# EAGLE board greenhousectrl (EAGLE 7.7.0)
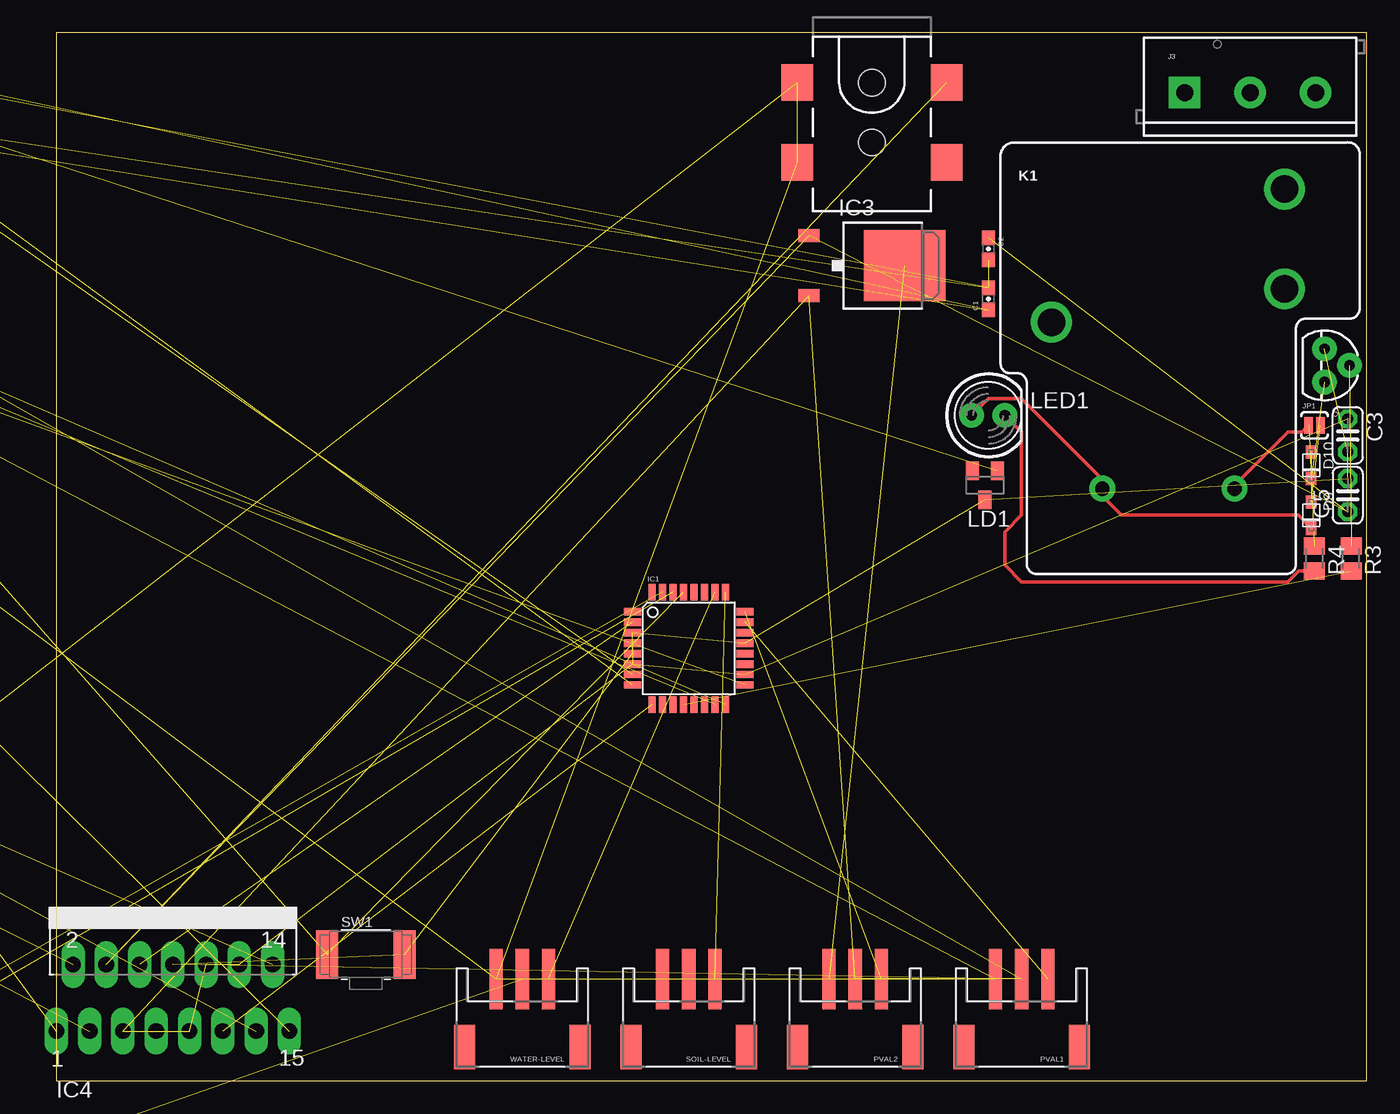
[diagram p0: board, top side]
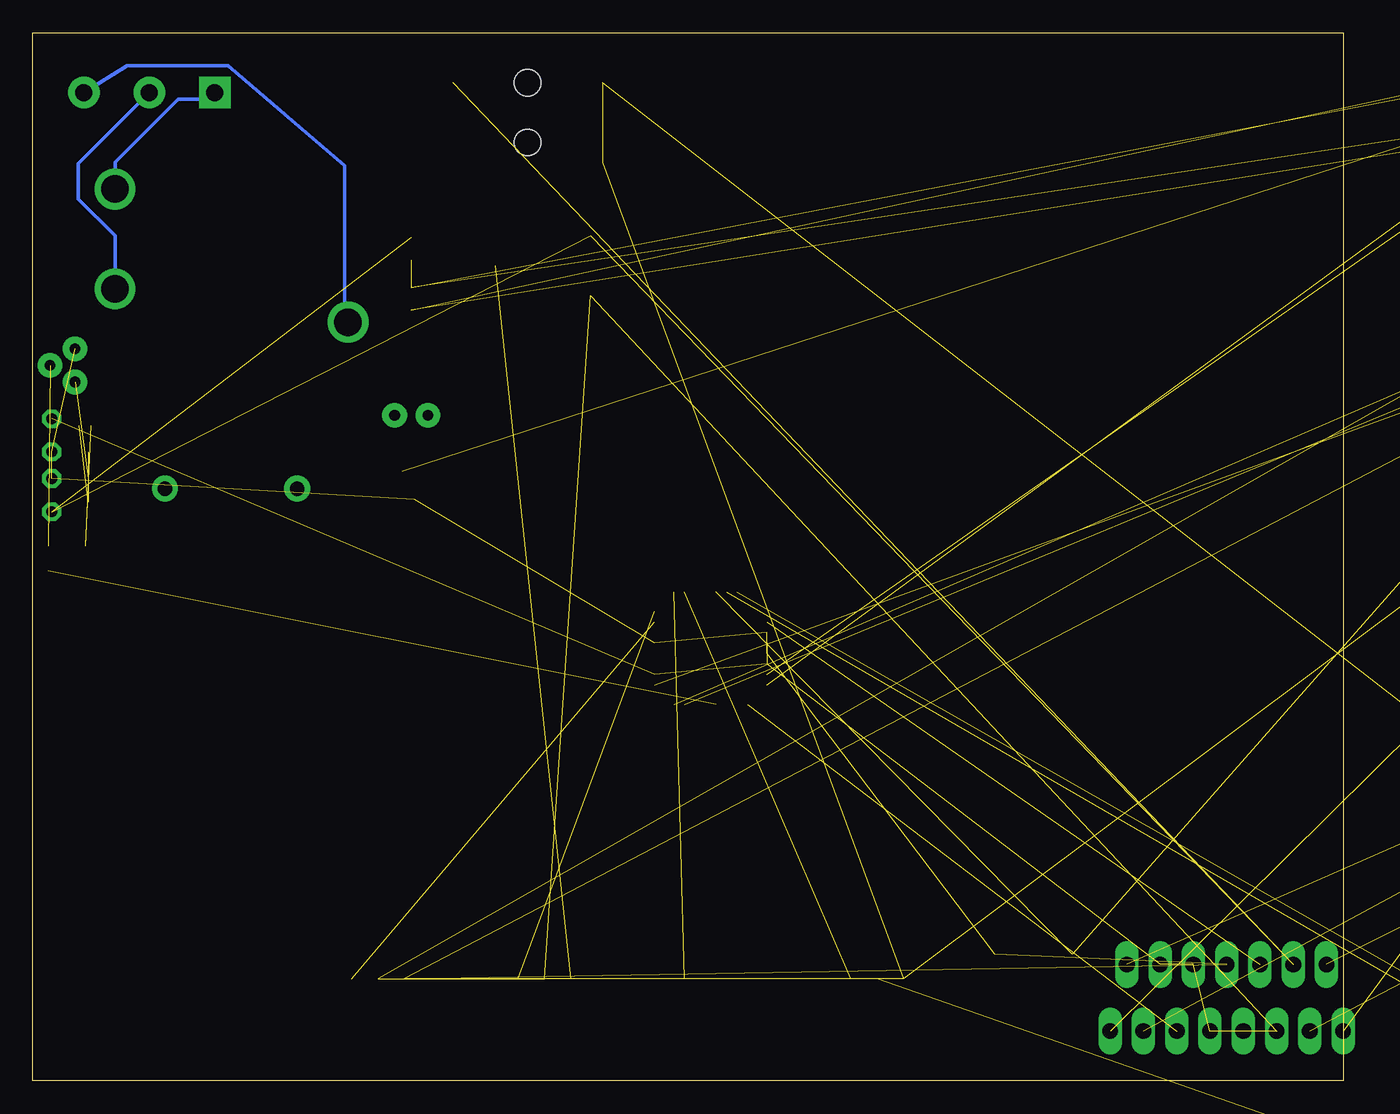
[diagram p1: board, bottom side, seen from below]

Size 100 x 80 mm. Coordinates in mm from the lower left corner, seen from the top.
Outline: 0,0 100,0 100,80 0,80 0,0
Copper layers (1*16): Top 0.035mm / dielectric 1.5mm / Bottom 0.035mm
Design rules "default *": minimum track width 10mil, minimum drill 24mil, track to track 8mil, track to pad 8mil, pad to pad 8mil, via to via 8mil, smd to smd 8mil, copper to edge 40mil, drill to drill 8mil, minimum pad ring 10mil, minimum via ring 8mil, stop-mask expansion 4mil, vias tented up to drill 0mil, thermal gap 10mil

## Footprints (pad centres in the part's own frame; a part is rotated, then mirrored left to right if it is on the bottom)
0603-CAP = smd 1.1 x 1: 1 -0.85,0; 2 0.85,0
C025-024X044 = drill 0.813 pad 1.422 octagon: 1 -1.27,0; 2 1.27,0
SOD-323F = smd 1 x 0.8: A -1,0; C 1,0
06X1-PTH = drill 1.016 octagon: 1 -6.35,0; 2 -3.81,0; 3 -1.27,0; 4 1.27,0; 5 3.81,0; 6 6.35,0
TQFP32-08 = smd 1.27 x 0.559: 1 -4.293,2.8; 2 -4.293,2; 3 -4.293,1.2; 4 -4.293,0.4; 5 -4.293,-0.4; 6 -4.293,-1.2; 7 -4.293,-2; 8 -4.293,-2.8; 17 4.293,-2.8; 18 4.293,-2; 19 4.293,-1.2; 20 4.293,-0.4; 21 4.293,0.4; 22 4.293,1.2; 23 4.293,2; 24 4.293,2.8 | smd 0.559 x 1.27: 9 -2.8,-4.293; 10 -2,-4.293; 11 -1.2,-4.293; 12 -0.4,-4.293; 13 0.4,-4.293; 14 1.2,-4.293; 15 2,-4.293; 16 2.8,-4.293; 25 2.8,4.293; 26 2,4.293; 27 1.2,4.293; 28 0.4,4.293; 29 -0.4,4.293; 30 -1.2,4.293; 31 -2,4.293; 32 -2.8,4.293
TO252 = smd 1 x 1.6: 1 -2.28,-4.8; 2 2.28,-4.8 | smd 5.4 x 6.2: 3 0,2.5
MULTIWATT-15 = drill 1.2 long: 1 -8.89,-7.62; 2 -7.62,-2.54; 3 -6.35,-7.62; 4 -5.08,-2.54; 5 -3.81,-7.62; 6 -2.54,-2.54; 7 -1.27,-7.62; 8 0,-2.54; 9 1.27,-7.62; 10 2.54,-2.54; 11 3.81,-7.62; 12 5.08,-2.54; 13 6.35,-7.62; 14 7.62,-2.54; 15 8.89,-7.62
AVRISP = drill 0.9 pad 1.626: 1 -1.27,2.54; 2 1.27,2.54; 3 -1.27,0; 4 1.27,0; 5 -1.27,-2.54; 6 1.27,-2.54
POWER_JACK_SMD = smd 2.8 x 2.4: GND 0,-5.7; P$4 6.1,-5.7; VIN0 0,5.7; VIN1 6.1,5.7 | hole 2.032: 0,0; 4.572,0
SCREWTERMINAL-5MM-3 = drill 1.3 pad 2.413 square: 1 0,0 | drill 1.3 pad 2.413: 2 5,0; 3 10,0
PAD-JUMPER-2-NO_YES_SILK = smd 0.635 x 1.27: 1 -0.45,0; 2 0.45,0
RELAY-T90 = drill 1.1 pad 1.956: COIL1 0,-13.9; COIL2 0,-3.81 | drill 2.1: MAIN -12.7,-17.78; NC -22.86,0; NO -15.24,0
SOT23 = smd 1 x 1.4: 1 -0.95,-1.1; 2 0.95,-1.1; 3 0,1.1
LED5MM-KIT = drill 0.813 pad 1.88: A -1.27,0; K 1.27,0
JSTPH3 = smd 1 x 4.6: 1 -2,-2.7; 2 0,-2.7; 3 2,-2.7 | smd 1.6 x 3.4: NC1 -4.4,2.5; NC2 4.4,2.5
TO-92-EZ = drill 0.813 pad 1.88: 1 -1.27,0; 2 0,1.905; 3 1.27,0
M0805 = smd 1.3 x 1.6: 1 -0.95,0; 2 0.95,0
03P = drill 0.914 long: 1 -2.54,0; 2 0,0; 3 2.54,0
FE20 = drill 0.813 long: 1 -24.13,0; 2 -21.59,0; 3 -19.05,0; 4 -16.51,0; 5 -13.97,0; 6 -11.43,0; 7 -8.89,0; 8 -6.35,0; 9 -3.81,0; 10 -1.27,0; 11 1.27,0; 12 3.81,0; 13 6.35,0; 14 8.89,0; 15 11.43,0; 16 13.97,0; 17 16.51,0; 18 19.05,0; 19 21.59,0; 20 24.13,0
BTN_CK_KSS = smd 1.7 x 3.7: P$1 -2.95,0; P$2 2.95,0
W237-103 = drill 1.194 long: 1 -5,-1.29; 2 0,-1.29; 3 5,-1.29
W237-102 = drill 1.194 long: 1 -2.5,-1.27; 2 2.5,-1.27
RESONATOR-SMD = smd 0.45 x 1.905: 1 -1.2,0; 2 0,0; 3 1.2,0

## Placement (x,y rotation side)
C1  0.1uF  [0603-CAP]  71.12,59.69 90 top
C2  0.1uF  [0603-CAP]  71.12,63.5 270 top
C3  [C025-024X044]  98.55,49.28 270 top
C4  0.1uF  [0603-CAP]  -76.2,86.36 0 top  (outside the outline)
C5  [C025-024X044]  98.55,44.7 90 top
D9  1N4148  [SOD-323F]  95.76,43.18 270 top
D10  Zener  [SOD-323F]  95.76,46.99 270 top
FTDI-SERIAL-HEADER  HEADER-06X1-MALE  [06X1-PTH]  -76.2,-31.75 0 top  (outside the outline)
IC1  ATMEGA168TQFP-08  [TQFP32-08]  48.26,33.02 0 top
IC3  7805DT  [TO252]  62.23,62.23 270 top
IC4  L298  [MULTIWATT-15]  8.89,11.43 0 top
ICSP-PROG-HEADER  AVRISP-6  [AVRISP]  -16.51,55.88 0 top  (outside the outline)
J1  5.5x2.1mm Barrel  [POWER_JACK_SMD]  62.23,76.2 270 top
J3  [SCREWTERMINAL-5MM-3]  86.11,75.44 0 top
JP1  JUMPER-PAD-2-NOYES_SILK  [PAD-JUMPER-2-NO_YES_SILK]  96.01,50.04 0 top
K1  JQX-15F  [RELAY-T90]  93.73,45.21 270 top
LD1  PL006-WCR12  [SOT23]  70.87,45.47 180 top
LD2  PL006-WCR12  [SOT23]  -55.88,73.66 0 top  (outside the outline)
LED1  [LED5MM-KIT]  71.12,50.8 0 top
PVAL1  [JSTPH3]  73.66,5.08 180 top
PVAL2  [JSTPH3]  60.96,5.08 180 top
Q1  2N3904  [TO-92-EZ]  96.77,54.61 270 top
R1  [M0805]  -49.53,86.36 0 top  (outside the outline)
R2  [M0805]  -54.61,86.36 0 top  (outside the outline)
R2(SMD)  [M0805]  -44.45,86.36 0 top  (outside the outline)
R3  1K  [M0805]  98.81,39.88 270 top
R4  1K  [M0805]  96.01,39.88 270 top
R5  [M0805]  -59.69,86.36 0 top  (outside the outline)
R6  [M0805]  -64.77,86.36 0 top  (outside the outline)
SL1  [03P]  -80.01,-46.99 0 top  (outside the outline)
SL2  [03P]  -80.01,-62.23 0 top  (outside the outline)
SL3  [03P]  -80.01,-77.47 0 top  (outside the outline)
SL4  [03P]  -80.01,-92.71 0 top  (outside the outline)
SOIL-LEVEL  [JSTPH3]  48.26,5.08 180 top
SV1  [FE20]  -48.26,81.28 0 top  (outside the outline)
SW1  [BTN_CK_KSS]  23.62,9.65 0 top
WATER-LEVEL  [JSTPH3]  35.56,5.08 180 top
X1  [W237-103]  -76.71,-12.95 0 top  (outside the outline)
X1-MOT1  [W237-102]  -64.77,46.99 0 top  (outside the outline)
X2-MOT2  [W237-102]  -74.93,46.99 0 top  (outside the outline)
Y2  16MHZ  [RESONATOR-SMD]  -34.29,87.63 0 top  (outside the outline)

## Library data of the parts
C1 C2 C4 = SparkFun-Capacitors; PROD_ID: CAP-00810
C3 C5 D10 IC3 ICSP-PROG-HEADER PVAL1 PVAL2 R1 R2 R2(SMD) R3-R6 SOIL-LEVEL SW1 WATER-LEVEL = adafruit
D9 = adafruit; PROD_ID: DIO-08378
FTDI-SERIAL-HEADER = GeekAmmo; OTHER: 4UCON 00834; URL: http://www.4uconnector.com/online/SearchPro.asp?FormName=ProSearch&FormAction=search&s_GroupNo=&s_keyword=00834
IC1 = atmega328p
IC4 = st-microelectronics; MPN: L298N; OC_FARNELL: 1589425; OC_NEWARK: 32M1527
J1 = SparkFun-Connectors; PROD_ID: CONN-08106; SF_ID: PRT-12748
J3 = SparkFun-Connectors; PROD_ID: CONN-10134; STOREFRONT_ID: PRT-08433
JP1 = SparkFun-Passives
K1 = SparkFun-Electromechanical; PROD_ID: COMP-10736
LD1 LD2 = led
LED1 = SparkFun-LED; PROD_ID: DIO-09529
Q1 = SparkFun-DiscreteSemi; PROD_ID: TRANS-08447
SL1-SL4 = con-amp-quick; OC_FARNELL: unknown; OC_NEWARK: unknown
SV1 = con-lsta; OC_FARNELL: unknown; OC_NEWARK: unknown
X1 = con-wago-500; MPN: 237-103; OC_FARNELL: unknown; OC_NEWARK: 18M7116
X1-MOT1 X2-MOT2 = con-wago-500; MPN: 237-102; OC_FARNELL: unknown; OC_NEWARK: 70K9898
Y2 = SparkFun-FreqCtrl; PROD_ID: XTAL-08900

## Nets
+5V: C1.1 C3.1 FTDI-SERIAL-HEADER.3 IC1.4 IC1.6 IC1.18 IC3.2 IC4.5 IC4.7 IC4.9 IC4.10 IC4.12 ICSP-PROG-HEADER.2 PVAL1.2 PVAL2.2 R2(SMD).2 R2.1 SOIL-LEVEL.2 SV1.2 SV1.15 WATER-LEVEL.2
+12V: C2.1 C5.1 IC3.1 IC4.4 J1.VIN0
ADC4: SV1.4
ADC5: SV1.5
COIL: D10.C JP1.1 K1.COIL2 Q1.3 R4.1
COMMON: J3.3 K1.MAIN
CTS(DOESNTEXIST): FTDI-SERIAL-HEADER.2
DIODENODE: D9.A D10.A JP1.2
DTR: C4.1 FTDI-SERIAL-HEADER.6
GND: C1.2 C2.2 C3.2 C5.2 FTDI-SERIAL-HEADER.1 IC1.3 IC1.5 IC1.21 IC3.3 IC4.8 ICSP-PROG-HEADER.6 J1.GND J1.P$4 LD1.3 LD2.3 PVAL1.3 PVAL2.3 Q1.1 R5.2 R6.2 SOIL-LEVEL.3 SV1.1 SV1.3 SV1.16 SW1.P$2 WATER-LEVEL.3 Y2.2
MISO: IC1.16 ICSP-PROG-HEADER.1 SV1.13
MOSI: IC1.15 ICSP-PROG-HEADER.4 SV1.12
N$2: LD2.1 R2.2
N$3: LED1.K R4.2
N$6: Q1.2 R3.1
N$7: IC4.2 X2-MOT2.2
N$8: IC4.13 X1-MOT1.2
N$9: IC4.14 X1-MOT1.1
N$10: LD1.1 R1.1
N$11: IC1.7 Y2.1
N$13: IC4.1 R5.1
N$14: IC4.15 R6.1
N$15: IC4.3 X2-MOT2.1
N$16: IC1.8 Y2.3
NC: J3.1 K1.NC
NO: J3.2 K1.NO
PB0: IC1.12 R3.2
PB1: IC1.13
PB2: IC1.14
PC0: IC1.23 PVAL1.1
PC1: IC1.24 PVAL2.1
PC2: IC1.25 SOIL-LEVEL.1
PC3: IC1.26 WATER-LEVEL.1
PC4: IC1.27
PC5: IC1.28
PD2: IC1.32
PD3: IC1.1
PD4: IC1.2 IC4.6
PD5: IC1.9 IC4.11
PD6: IC1.10
PD7: IC1.11
RST: C4.2 IC1.29 ICSP-PROG-HEADER.5 R2(SMD).1 SW1.P$1
RX: FTDI-SERIAL-HEADER.5 IC1.30
SCK: IC1.17 ICSP-PROG-HEADER.3 R1.2 SV1.14
SS: SV1.11
TX: FTDI-SERIAL-HEADER.4 IC1.31
VCC: D9.C K1.COIL1 LED1.A

## Tracks (layer width: path | path; a pad name or v marks a point on that pad's centre or on a via)
+5V  (20 unrouted)
+12V  (4 unrouted)
COIL  (3 unrouted)
  Top 0.254: K1.COIL2 89.92,45.47 93.98,49.53 95.05,49.53 JP1.1
COMMON
  Bottom 0.254: K1.MAIN 76.2,58.17 76.2,69.85 85.09,77.47 92.8,77.47 J3.3
DIODENODE  (2 unrouted)
DTR  (1 unrouted)
GND  (26 unrouted)
MISO  (2 unrouted)
MOSI  (2 unrouted)
N$2  (1 unrouted)
N$3
  Top 0.254: R4.2 94.81,38.93 93.98,38.1 73.66,38.1 72.39,39.37 72.39,41.91 73.66,43.18 73.66,49.53 LED1.K
N$6  (1 unrouted)
N$7  (1 unrouted)
N$8  (1 unrouted)
N$9  (1 unrouted)
N$10  (1 unrouted)
N$11  (1 unrouted)
N$13  (1 unrouted)
N$14  (1 unrouted)
N$15  (1 unrouted)
N$16  (1 unrouted)
NC
  Bottom 0.254: K1.NC 93.73,70.1 88.9,74.93 86.61,74.93 J3.1
NO
  Bottom 0.254: K1.NO 93.73,64.52 96.52,67.31 96.52,70.02 J3.2
PB0  (1 unrouted)
PC0  (1 unrouted)
PC1  (1 unrouted)
PC2  (1 unrouted)
PC3  (1 unrouted)
PD4  (1 unrouted)
PD5  (1 unrouted)
RST  (4 unrouted)
RX  (1 unrouted)
SCK  (3 unrouted)
TX  (1 unrouted)
VCC
  Top 0.254: LED1.A 71.12,52.07 73.66,52.07 79.83,45.9 K1.COIL1 79.83,44.63 81.28,43.18 94.76,43.18 D9.C